# Altium PCB CAN_Sniffer_HAT.PcbDoc
Units mm, origin at the board's own origin, x right, y up, seen from the top; angles counter-clockwise.
Board outline 65.03 x 30.03 mm, 2 copper layers (Top Layer, Bottom Layer); 24 components, 41 nets, 116 pads, 34 vias.
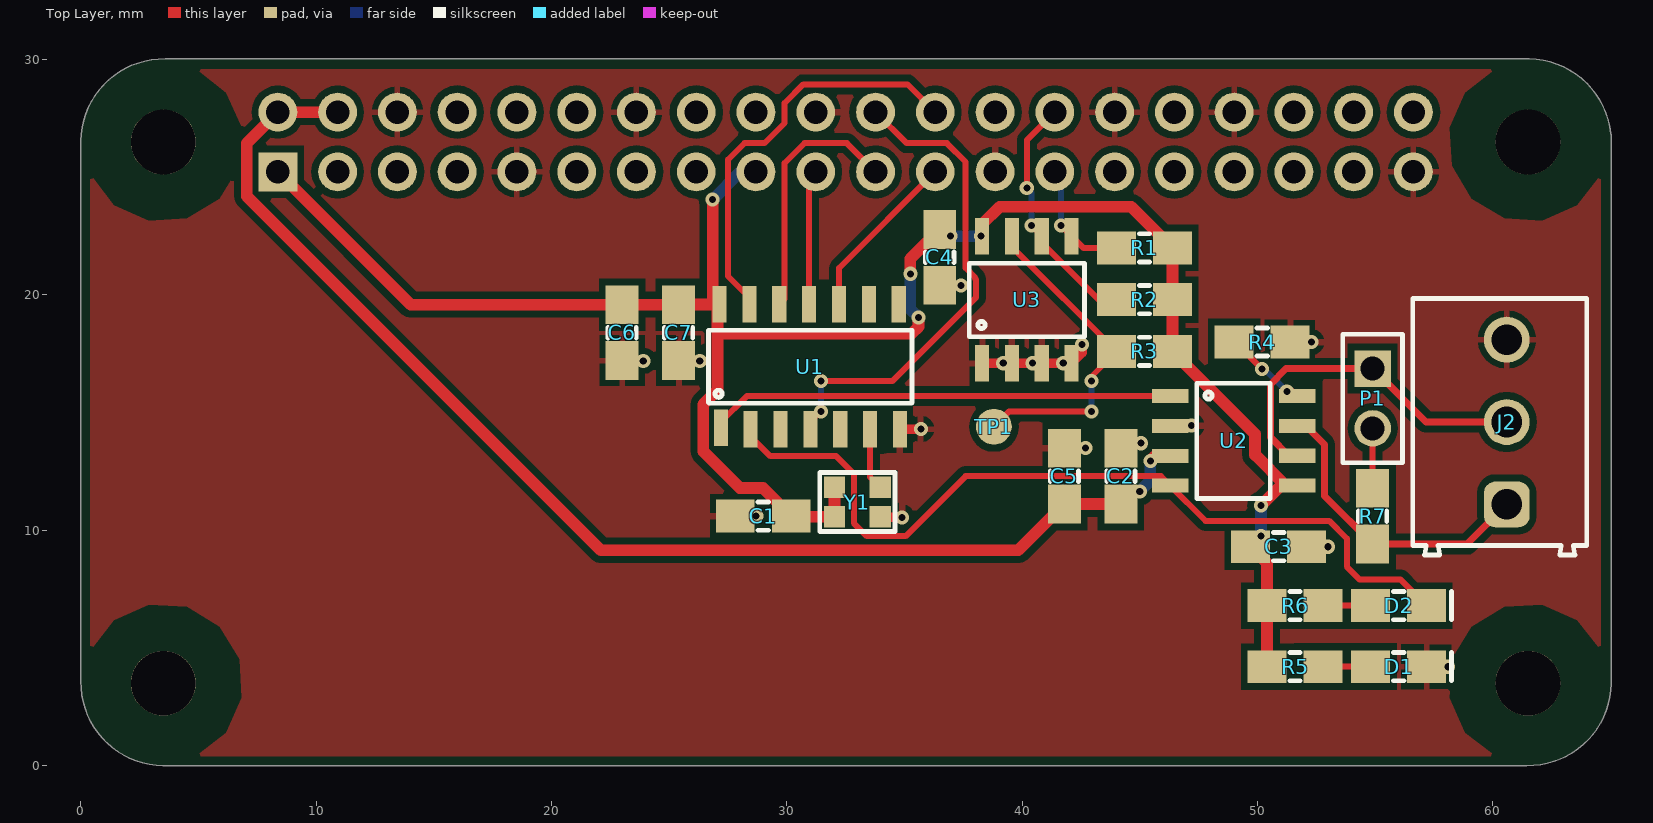
[diagram p0: Top Layer view]
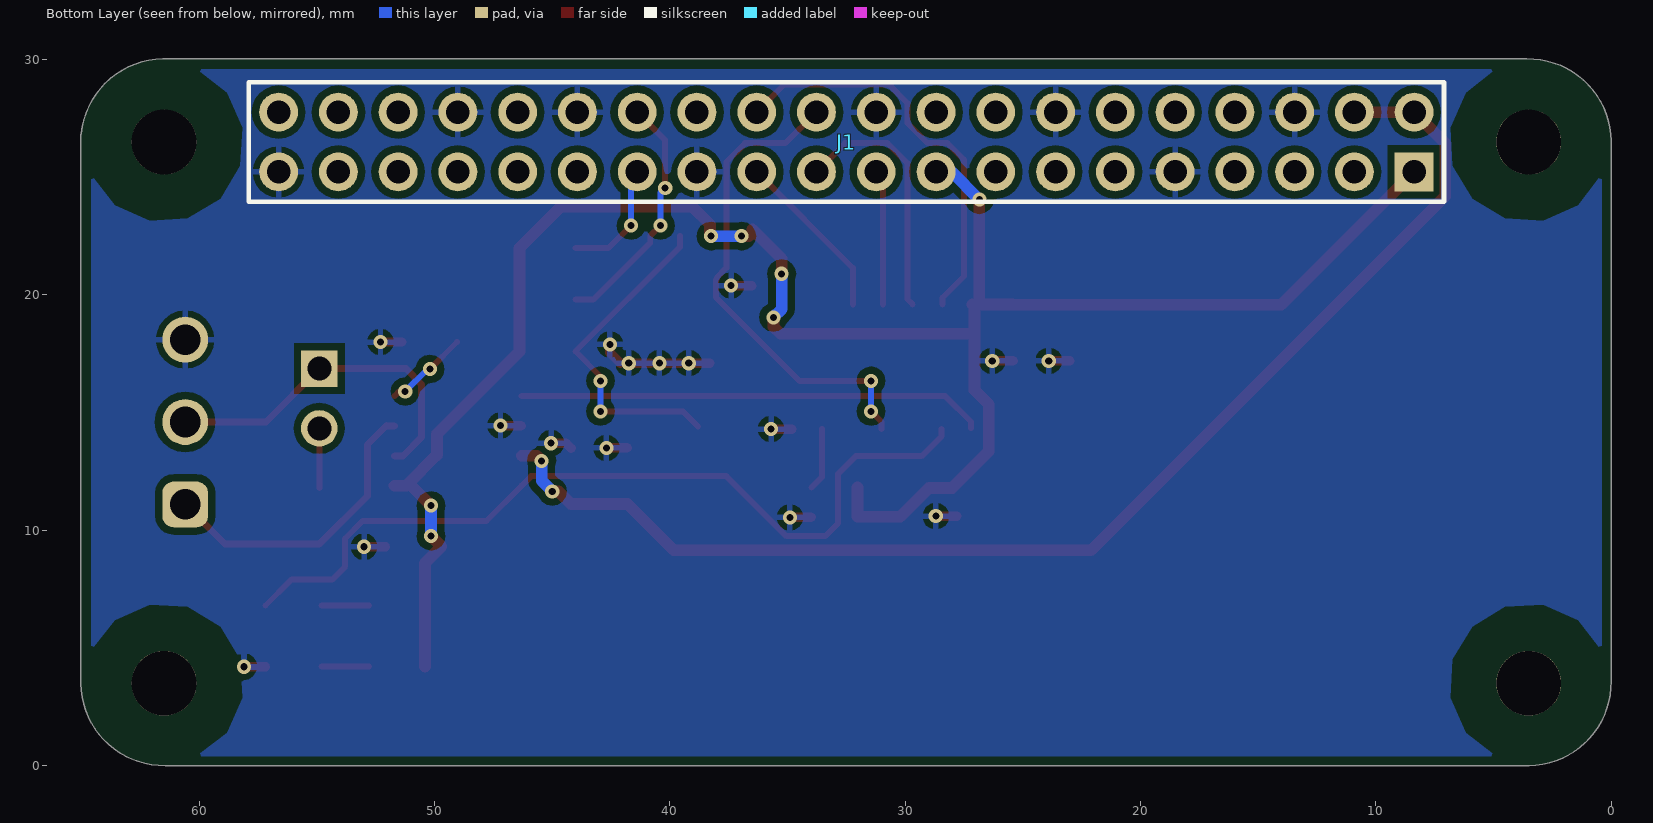
[diagram p1: Bottom Layer view, seen from below]
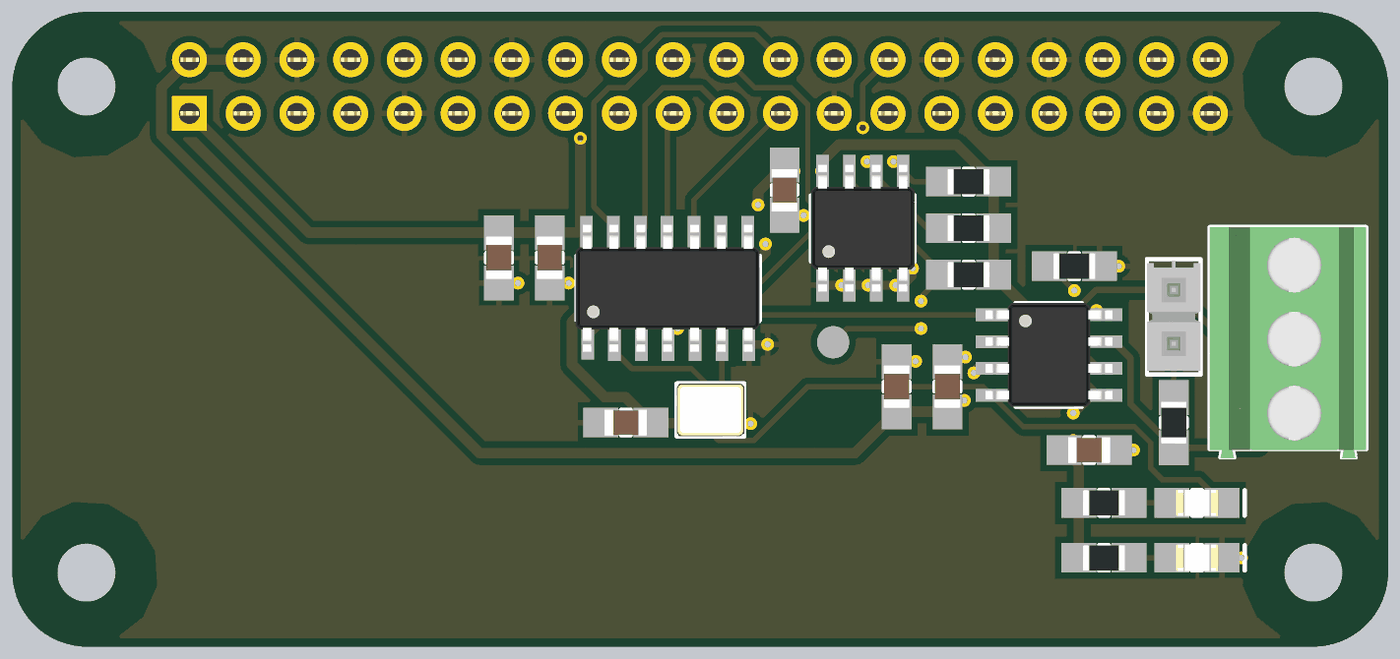
[diagram p2: 3D render of the assembled board from above, using the file's embedded part models]

## Layer stack, top to bottom
Top Solder: solder mask 0.0102, Solder Resist, Dk 3.5
Top Layer: signal copper 0.0356
Dielectric 1: dielectric 0.32, FR-4, Dk 4.8
Bottom Layer: signal copper 0.0356
Bottom Solder: solder mask 0.0102, Solder Resist, Dk 3.5

## Board outline
3.487,0 cw(c3.532,3.532) 0,3.578 0,3.587 0,26.543 0,26.545 cw(c3.532,26.5) 3.582,30.032 3.587,30.032 61.543,30.032 61.545,30.032 cw(c61.5,26.5) 65.014,26.861 65.032,26.795 65.032,3.489 65.032,3.487 cw(c61.5,3.532) 61.453,0 61.445,0

## Design rules (kind name [scope] priority, off if disabled: settings)
Clearance Clearance_Pour [InPolygon] p1: gap=0.3 ignorepadtopadclearanceinfootprint=FALSE
Clearance Clearance_6mil [All] p2: gap=0.152 ignorepadtopadclearanceinfootprint=FALSE
FanoutControl Fanout_Default [All] p1: bgadir=Out bgaviamode=Centered fanoutstyle=Auto fanoutdirection=Alternating viagrid=0.025 // Fanout_Default (Default Rule)
FanoutControl Fanout_Small [(CompPinCount < 5)] p2: bgadir=Out bgaviamode=Centered fanoutstyle=Auto fanoutdirection=OutThenIn viagrid=0.025 // Fanout_Small (Default Rule)
FanoutControl Fanout_LCC [IsLCC] p4: bgadir=Out bgaviamode=Centered fanoutstyle=Auto fanoutdirection=Alternating viagrid=0.025 // Fanout_LCC (Default Rule)
FanoutControl Fanout_BGA [IsBGA] p5: bgadir=Out bgaviamode=Centered fanoutstyle=Auto fanoutdirection=Alternating viagrid=0.025 // Fanout_BGA (Default Rule)
HoleSize HoleSize_0mm3_to_3mm [All] p1: absolutevalues=TRUE maxlimit=3 minlimit=0.3 maxpercent=80.000 minpercent=20.000
MinimumAnnularRing AnnularRing_0mm15 [All] p1: minimumring=0.15
MinimumSolderMaskSliver [All] p1: minsoldermaskwidth=0.1
PolygonConnect [All] p1: connectstyle=Relief reliefconductorwidth=0.254 reliefentries=4 polygonreliefangle="90 Angle" airgapwidth=0.254
RoutingVias [All] p1: holewidth=0.3 width=0.6 viastyle="Through Hole" minholewidth=0.3 minwidth=0.6 maxholewidth=0.4 maxwidth=0.8
SilkToSilkClearance [All] p1: silktosilkclearance=0.1
SilkToSolderMaskClearance [IsPad] p1: minsilkscreentomaskgap=0.01 clearancetoexposedcopper=TRUE
SolderMaskExpansion [All] p1: expansion=0 istentingtop=FALSE
SupplyNets "Schematic Supply Nets" [InNet('GND')] p1: voltage=0.000
SupplyNets "Schematic Supply Nets_1" [InNet('+5V')] p2: voltage=0.000
SupplyNets "Schematic Supply Nets_2" [InNet('+3V3')] p3: voltage=0.000
Width Width_CAN [InNet('CANH') or InNet('CANL')] p1: maxlimit=0.5 minlimit=0.2 preferedwidth=0.3 minimp=50.000000 maximp=50.000000 favimp=50.000000
Width Width_Power [InNet('+3V3') or InNet('+5V') or InNet('GND')] p2: maxlimit=1 minlimit=0.3 preferedwidth=0.5 minimp=50.000000 maximp=50.000000 favimp=50.000000
Width Width_6mil_min [not (InNet('+3V3') or InNet('+5V') or InNet('GND') or InNet('CANH') or InNet('CANL'))] p3: maxlimit=1.524 minlimit=0.152 preferedwidth=0.254 minimp=50.000000 maximp=50.000000 favimp=50.000000
22 further rules are at their usual default settings.

## Components (designator, comment, footprint, x,y, rotation, side; value= is the part's Value field where it differs from the comment)
C1 "100nF" 0805 29,10.6 r180 top
C2 "100nF" 0805 44.2,12.3 r90 top
C3 "100nF" 0805 50.9,9.3 r0 top
C4 "100nF" 0805 36.5,21.6 r270 top
C5 "10uF" 0805 41.8,12.3 r90 top
C6 "10uF" 0805 23,18.4 r270 top
C7 "100nF" 0805 25.4,18.4 r270 top
D1 "Green PWR" LED_0805 56,4.2 r0 top
D2 "Yellow ACT" LED_0805 56,6.8 r0 top
J1 "Pi 40-pin GPIO" HDR_2X20_254 32.5,26.5 r0 bottom locked
J2 "CAN 3.5mm" 691214110003 60.3,14.6 r90 top
P1 "TERM" SMTC-TSW-102-26-XX-S 54.9,16.87 r270 top
R1 "3k9" 0805 45.2,22 r0 top
R2 "3k9" 0805 45.2,19.8 r0 top
R3 "1k" 0805 45.2,17.6 r0 top
R4 "10k" 0805 50.2,18 r0 top
R5 "1k" 0805 51.6,4.2 r0 top
R6 "1k" 0805 51.6,6.8 r0 top
R7 "120R 1%" 0805 54.9,10.6 r90 top
TP1 "WP" TESTPOINT_60 38.8,14.4 r0 top
U1 "MCP2518FDT-H/SL" SOIC-14_150MIL 31,17 r90 top
U2 "MCP2562FD-E/SN" SOIC-8_150MIL 49,13.8 r0 top
U3 "CAT24C32WI-GT3" SOIC-8_150MIL 40.2,19.8 r90 top
Y1 "OSCILLATOR" XTAL_3225_4P 33,11.2 r0 top

## Footprints (in the part's own frame and the unit in brackets; to place one, negate y for a bottom-side part, rotate by r counter-clockwise, add the part's x,y. Pads: shape width x height; smd on the part's side, far side on the other; paste and mask are expansions set on the pad)
0805 [mm] "0805 chip resistor/capacitor, hand-solder land"
  rect 1.65x1.4 smd: 1(-1.187,0) 2(1.187,0)
  silkscreen extent -0.23,-0.6 0.23,0.6, body extent -1,-0.63 1,0.63, height 1.25
691214110003 [mm] "3.50 mm Horizontal Entry Modular, 3p"
  rrect50% 1.95x1.95 hole 1.3: 1(-3.5,-0.3)
  round 1.95 hole 1.3: 2(0,-0.3) 3(3.5,-0.3)
  silkscreen extent -5.65,-3.7 5.25,3.7, body extent -5.7,-3.7 5.25,3.7, height 8.55
HDR_2X20_254 [mm] "2x20 pin header, 2.54 mm pitch, through-hole"
  rect 1.65x1.65 hole 1: 1(-24.13,1.27)
  round 1.65 hole 1: 2(-24.13,-1.27) 3(-21.59,1.27) 4(-21.59,-1.27) 5(-19.05,1.27) 6(-19.05,-1.27) 7(-16.51,1.27) 8(-16.51,-1.27) 9(-13.97,1.27) 10(-13.97,-1.27) 11(-11.43,1.27) 12(-11.43,-1.27) 13(-8.89,1.27) 14(-8.89,-1.27) 15(-6.35,1.27) 16(-6.35,-1.27) 17(-3.81,1.27) 18(-3.81,-1.27) 19(-1.27,1.27) 20(-1.27,-1.27) 21(1.27,1.27) 22(1.27,-1.27) 23(3.81,1.27) 24(3.81,-1.27) 25(6.35,1.27) 26(6.35,-1.27) 27(8.89,1.27) 28(8.89,-1.27) 29(11.43,1.27) 30(11.43,-1.27) 31(13.97,1.27) 32(13.97,-1.27) 33(16.51,1.27) 34(16.51,-1.27) 35(19.05,1.27) 36(19.05,-1.27) 37(21.59,1.27) 38(21.59,-1.27) 39(24.13,1.27) 40(24.13,-1.27)
  silkscreen extent -25.4,-2.54 25.4,2.54, body extent -25.4,-2.54 25.4,2.54, height 8.5
LED_0805 [mm] "0805 LED, hand-solder land, pad 2 = cathode"
  rect 1.65x1.4 smd: 1(-1.187,0) 2(1.187,0)
  silkscreen extent -0.23,-0.6 2.25,0.6, body extent -1,-0.63 1,0.63, height 1.1
SMTC-TSW-102-26-XX-S [mm] ".025 SQ Post Terminal Strip Assembly, 1x2 Pins, Vertical, 2.54mm Pitch, Male"
  rect 1.55x1.55 hole 1.02: 1(0,0)
  round 1.55 hole 1.02: 2(2.54,0)
  silkscreen extent -1.46,-1.27 4,1.27, body extent -1.4,-1.27 3.81,1.27, height 8.38
SOIC-8_150MIL [mm] "8-lead SOIC, 150 mil body, 1.27 mm pitch"
  rect 1.55x0.6 smd: 1(-2.7,1.9) 2(-2.7,0.632) 3(-2.7,-0.637) 4(-2.7,-1.905) 5(2.7,-1.905) 6(2.7,-0.635) 7(2.7,0.635) 8(2.7,1.905)
  silkscreen extent -1.57,-2.45 1.55,2.45, body extent -3,-2.45 3,2.45, height 1.75
SOIC-14_150MIL [mm] "14-lead SOIC, 150 mil body, 1.27 mm pitch"
  rect 1.55x0.6 smd: 1(-2.65,3.8) 2(-2.7,2.54) 3(-2.7,1.27) 4(-2.7,0) 5(-2.7,-1.27) 6(-2.7,-2.54) 7(-2.7,-3.81) 8(2.6,-3.76) 9(2.6,-2.49) 10(2.6,-1.22) 11(2.6,0.05) 12(2.6,1.32) 13(2.6,2.59) 14(2.6,3.86)
  silkscreen extent -1.6,-4.33 1.5,4.33, body extent -3.05,-4.32 2.95,4.38, height 1.75
TESTPOINT_60 [mil] "Test point, 60 mil round pad"
  round 60 smd: 1(0,0)
XTAL_3225_4P [mm] "3.2 x 2.5 mm 4-pad crystal - VERIFY against ordered part"
  rect 0.9x0.9 smd: 1(-0.975,-0.625) 2(0.975,-0.625) 3(0.975,0.625) 4(-0.975,0.625)
  silkscreen extent -1.6,-1.25 1.6,1.25, body extent -1.6,-1.25 1.6,1.25, height 0.64

## Part data
C1 C2 C3 C4 C5 C6 C7: library part CAP, "Capacitor, non-polarised, 0805"
D1 D2: library part LED, "LED, 0805"
J1: library part HDR_2X20_PI, "Raspberry Pi 40-pin GPIO header, 2x20, 2.54 mm"
J2: library part CMP-1502-02466-3, "2141 Series 3.5MM Pitch Straight, Pcb Terminal Block, Through Hole, 3 Way", Color="Blue, Green", Current=10A, Max Operating Temperature=105°C, Min Operating Temperature=-40°C, Voltage=300V, Contact Material=Brass, Contact Plating="Brass, Tin", Current Rating=10A, Height=12.2mm, Housing Material=Nylon, Lead Pitch=3.5mm, Length=7.4mm, Mount="Through Hole", Number of Contacts=3, Number of Levels=1, Number of Pins=3, Number of Positions Per Level=3, Packaging=Box, Pitch=3.5052mm, Plating="Brass, Steel", RoHS=Compliant, Stripping Length=-6mm, Termination=Screw, Voltage Rating=300V, Width=10.9mm, Wire Gauge (Max)=24AWG, Wire Gauge (Min)=16AWG, Wire/Cable Gauge=24AWG
P1: library part CMP-1024-00330-1, "0.025\" SQ Post Header, Through-hole, Vertical, -55 to 125 degC, 2.54 mm Pitch, 2-Pin, Male, RoHS", Manufacturer=Samtec, PartNumber=TSW-102-26-L-S, Temperature Range="-55 to 125 degC", ComponentLink1Description="Manufacturer URL", ComponentLink1URL=http://www.samtec.com, ComponentLink2Description=Datasheet, ComponentLink2URL=http://www.samtec.com/documents/webfiles/pdf/TSW_TH.PDF, ComponentLink3Description="Package Specification", ComponentLink3URL=http://www.samtec.com/documents/webfiles/cpdf/TSW-XXX-XX-XXX-X-XX-XXX-MKT.pdf, DatasheetVersion=F-214, Mounting Technology=Through-hole, Orientation=Vertical, PackageDescription=".025[0.64] SQ. Post Terminal Strip Assembly", PackageReference=TSW-102-26-XX-S, PackageVersion="DM, 8/1988", Pitch="2.54 mm", RoHS=True
R1 R2 R3 R4 R5 R6 R7: library part RES, "Resistor, 0805"
TP1: library part TESTPOINT, "Test point / probe pad"
U1: library part MCP2518FD, "CAN FD controller, SPI, 8 Mbit/s, SOIC-14"
U2: library part MCP2562FD, "CAN FD transceiver with VIO level shift, SOIC-8"
U3: library part CAT24C32, "32 kbit I2C EEPROM, 16-bit addressing, HAT ID EEPROM, SOIC-8"

## Free pads (board coordinates)
  round 2.75 hole 2.75 unplated: MH1(3.5,3.5) MH2(61.5,3.5) MH3(3.5,26.5) MH4(61.5,26.5)

## Via types
v1: diameter 0.6, hole 0.3, Top Layer to Bottom Layer, 34 vias

## Nets (pads, with @x,y where several pads share a name; then routed paths per layer and width w, separated by ;. In a path a pad name is that pad's centre, name@x,y a point inside that pad or via, vN(x,y) a via of type N, cw(c..) or ccw(c..) an arc to the next point about the centre after c; other vN are vias at no path point)
+3V3: C1.1 C3.1 C4.1 C6.1 C7.1 J1.1 J1.17 R1.2 R2.2 R3.2 R5.1 R6.1 U1.14 U2.5 U3.8 Y1.1 Y1.4 | length 88.5
  Top Layer w0.5: J1.1 14.013,19.587 23,19.587 C7.1@25.4,19.587 ; C7.1@25.413,19.6 U1.14 ; U1.14@26.85,19.6 v1(26.85,24.05) ; 27.05,18.35 35.3,18.35 35.6,18.65 v1(35.6,19.05) ; U1.14@27.05,19.6 27.05,15.95 26.45,15.35 26.45,13.35 28,11.8 28.987,11.8 C1.1 ; C1.1@30.212,10.575 Y1.1 Y1.4 ; v1(35.25,20.9) 35.25,21.537 C4.1 ; C4.1@36.5,22.65 36.65,22.5 v1(36.95,22.5) ; U3.8 38.295,22.995 39.05,23.75 44.637,23.75 R1.2 R2.2 R3.2 49.9,14.087 49.9,13.2 51.205,11.895 U2.5 ; C3.1 50.413,8.6 50.413,6.8 R5.1@50.413,4.2 ; C3.1@49.713,9.313 v1(50.15,9.75) ; v1(50.15,11.05) U2.5@51.1,12
  Bottom Layer w0.5: v1(26.85,24.05) 28.03,25.23 J1.17 ; v1(35.25,20.9) 35.25,19.4 v1(35.6,19.05) ; v1(36.95,22.5) v1(38.25,22.5) ; v1(50.15,9.75) v1(50.15,11.05)
+5V: C2.1 C5.1 J1.2 J1.4 U2.3 | length 54.3
  Top Layer w0.5: J1.4 J1.2 7.05,26.45 7.05,24.2 22.1,9.15 39.837,9.15 C5.1 C2.1 44.737,11.65 v1(45,11.65) ; v1(45.45,12.95) 45.663,13.163 U2.3
  Bottom Layer w0.5: v1(45,11.65) 45.45,12.1 v1(45.45,12.95)
CAN_INT: J1.22 U1.4 | length 21
  Top Layer w0.254: U1.4 31,14.6 v1(31.45,15.05) ; v1(31.45,16.35) 34.5,16.35 38.05,19.9 38.05,20.65 38,20.7 38,20.75 37.6,21.15 37.6,25.65 36.8,26.45 35.09,26.45 J1.22
  Bottom Layer w0.254: v1(31.45,15.05) v1(31.45,16.35)
CANH: J2.1 R7.1 U2.7 | length 13
  Top Layer w0.3: U2.7 U2.7@52.035,14.435 ; U2.7@52.05,14.45 52.85,13.65 52.85,11.463 R7.1 58.913,9.413 J2.1
CANL: J2.2 P1.1 U2.6 | length 15
  Top Layer w0.3: U2.6@51.35,13.15 50.55,13.95 50.55,16.2 51.22,16.87 P1.1 57.17,14.6 J2.2 ; U2.6@51.365,13.165 U2.6
EE_WP: R3.1 TP1.1 U3.7 | length 14.2
  Top Layer w0.254: TP1.1 39.45,15.05 v1(42.95,15.05) ; U3.7 39.565,22.048 R3.1 42.95,16.537 v1(42.95,16.35)
  Bottom Layer w0.254: v1(42.95,15.05) v1(42.95,16.35)
GND: C1.2 C2.2 C3.2 C4.2 C5.2 C6.2 C7.2 D1.2 J1.6 J1.9 J1.14 J1.20 J1.25 J1.30 J1.34 J1.39 J2.3 R4.2 U1.7 U2.2 U3.1 U3.2 U3.3 U3.4 Y1.2 | length 14.5
  Top Layer w0.4: C6.2@23.013,17.2 v1(23.9,17.2) ; C7.2@25.413,17.2 v1(26.3,17.2) ; C1.2 v1(28.7,10.6) ; Y1.2@34,10.55 v1(34.9,10.55) ; U1.7 v1(35.7,14.3) ; C4.2@36.513,20.4 v1(37.4,20.4) ; U3.1 v1(39.2,17.1) ; U3.2 v1(40.45,17.1) ; U3.3@40.837,17.1 v1(41.75,17.1) ; C5.2@41.813,13.5 v1(42.7,13.5) ; U3.4 42.55,17.545 v1(42.55,17.9) ; C2.2 44.413,13.7 v1(45.05,13.7) ; U2.2@46.318,14.45 v1(47.2,14.45) ; R4.2 v1(52.3,18) ; C3.2 v1(53,9.3) ; D1.2 v1(58.1,4.2)
GPIO2: J1.3
GPIO3: J1.5
GPIO4: J1.7
GPIO5: J1.29
GPIO6: J1.31
GPIO7: J1.26
GPIO12: J1.32
GPIO13: J1.33
GPIO14: J1.8
GPIO15: J1.10
GPIO16: J1.36
GPIO17: J1.11
GPIO18: J1.12
GPIO19: J1.35
GPIO20: J1.38
GPIO21: J1.40
GPIO22: J1.15
GPIO23: J1.16
GPIO24: J1.18
GPIO26: J1.37
GPIO27: J1.13
ID_SC: J1.28 R2.1 U3.6 | length 10.5
  Top Layer w0.254: v1(40.2,24.55) 40.2,26.58 J1.28 ; v1(40.4,22.95) U3.6@40.835,22.515 ; U3.6 40.835,22.215 43.25,19.8 R2.1
  Bottom Layer w0.254: v1(40.2,24.55) 40.4,24.35 v1(40.4,22.95)
ID_SD: J1.27 R1.1 U3.5 | length 5.1
  Top Layer w0.254: v1(41.65,22.95) U3.5@42.1,22.5 ; U3.5 42.605,22 R1.1
  Bottom Layer w0.254: J1.27 41.65,24.97 v1(41.65,22.95)
LED_ACT: D2.1 R6.2 | length 2
  Top Layer w0.254: R6.2 D2.1
LED_PWR: D1.1 R5.2 | length 2
  Top Layer w0.254: R5.2 D1.1
RXCAN: D2.2 U1.2 U2.4 | length 36.1
  Top Layer w0.254: U1.2@28.45,14 29.3,13.15 32.1,13.15 32.85,12.4 32.85,10.3 33.4,9.75 35.05,9.75 37.6,12.3 45.895,12.3 U2.4 47.795,10.4 53.05,10.4 53.8,9.65 53.8,8.45 54.35,7.9 56.087,7.9 D2.2 ; U1.2@28.46,14.01 U1.2
SPI_CE0: J1.24 U1.13 | length 17.6
  Top Layer w0.254: U1.13 28.41,19.89 27.5,20.8 27.5,25.75 28.2,26.45 29.05,26.45 29.9,27.3 29.9,28.15 30.7,28.95 35.13,28.95 J1.24
SPI_MISO: J1.21 U1.12 | length 10.8
  Top Layer w0.254: U1.12 29.9,19.82 29.9,25.6 30.75,26.45 32.55,26.45 J1.21
SPI_MOSI: J1.19 U1.11 | length 5.7
  Top Layer w0.254: U1.11 30.95,24.95 J1.19
SPI_SCLK: J1.23 U1.10 | length 7.3
  Top Layer w0.254: U1.10 32.22,21.14 J1.23
STBY: R4.1 U2.8 | length 3.6
  Top Layer w0.254: R4.1@49.05,18 v1(50.2,16.85) ; v1(51.25,15.9) 51.505,15.9 U2.8
  Bottom Layer w0.254: v1(50.2,16.85) 50.3,16.85 v1(51.25,15.9)
TERM: P1.2 R7.2 | length 2.5
  Top Layer w0.254: R7.2 P1.2
TXCAN: U1.1 U2.1 | length 19.8
  Top Layer w0.254: U1.1 27.2,14.6 28.3,15.7 U2.1
XTAL1: U1.6 Y1.3 | length 2.7
  Top Layer w0.254: U1.6 33.54,12.26 Y1.3
pads on no net: U1.3 U1.5 U1.8 U1.9

## Polygon pours and split planes (outlines as drawn)
GND on Top Layer "GND_Top" (solid, remove dead copper, pour order 2): 0.4,4.896 1.404,6.177 2.888,6.844 4.512,6.746 5.904,5.904 6.746,4.512 6.844,2.888 6.177,1.404 4.896,0.4 60.104,0.4 58.823,1.404 58.156,2.888 58.254,4.512 59.096,5.904 60.488,6.746 62.112,6.844 63.596,6.177 64.6,4.896 64.6,25.104 63.596,23.823 62.112,23.156 60.488,23.254 59.096,24.096 58.254,25.488 58.156,27.112 58.823,28.596 60.104,29.6 4.896,29.6 6.177,28.596 6.844,27.112 6.746,25.488 5.904,24.096 4.512,23.254 2.888,23.156 1.404,23.823 0.4,25.104
GND on Bottom Layer "GND_Bottom" (solid, remove dead copper, pour order 3): 0.4,4.896 1.404,6.177 2.888,6.844 4.512,6.746 5.904,5.904 6.746,4.512 6.844,2.888 6.177,1.404 4.896,0.4 60.104,0.4 58.823,1.404 58.156,2.888 58.254,4.512 59.096,5.904 60.488,6.746 62.112,6.844 63.596,6.177 64.6,4.896 64.6,25.104 63.596,23.823 62.112,23.156 60.488,23.254 59.096,24.096 58.254,25.488 58.156,27.112 58.823,28.596 60.104,29.6 4.896,29.6 6.177,28.596 6.844,27.112 6.746,25.488 5.904,24.096 4.512,23.254 2.888,23.156 1.404,23.823 0.4,25.104

## Silkscreen, mask and mechanical layers (free items; w line width, h text height)
Mechanical 1:
  lines w0.254: 0.127,3.587 ccw(c3.532,3.532) 3.489,0.127 61.445,0.127 ccw(c61.5,3.532) 64.905,3.489 64.905,26.795 ; 0.127,3.587 0.127,26.543 cw(c3.532,26.5) 3.587,29.905 61.543,29.905 cw(c61.5,26.5) 64.905,26.445